# Altium PCB LaserTagTargetBoard.PcbDoc
Units mil, origin at the board's own origin, x right, y up, seen from the top; angles counter-clockwise.
Board outline 2810 x 2320 mil, 2 copper layers (Top Layer, Bottom Layer); 7 components, 34 nets, 46 pads, 3 vias.
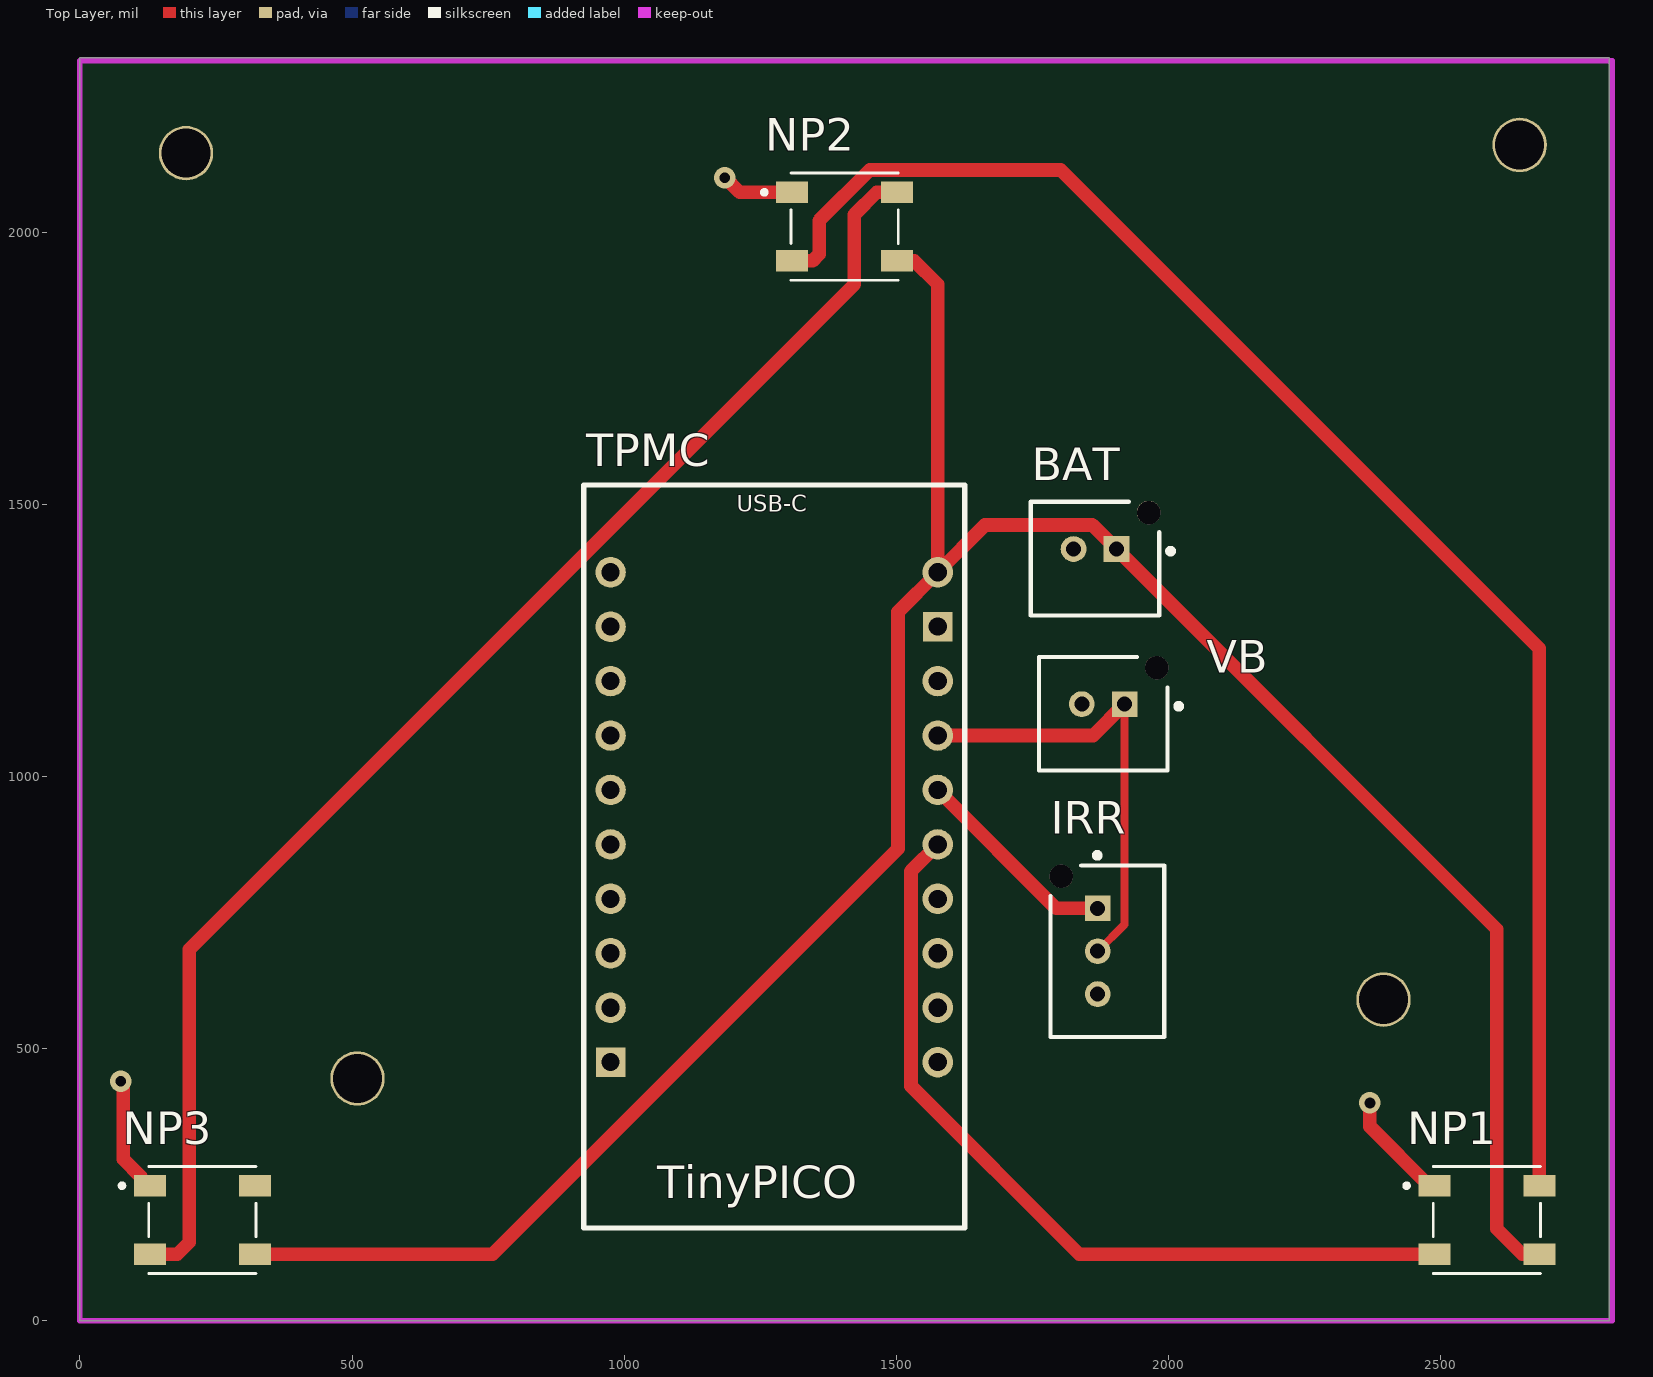
[diagram p0: Top Layer view]
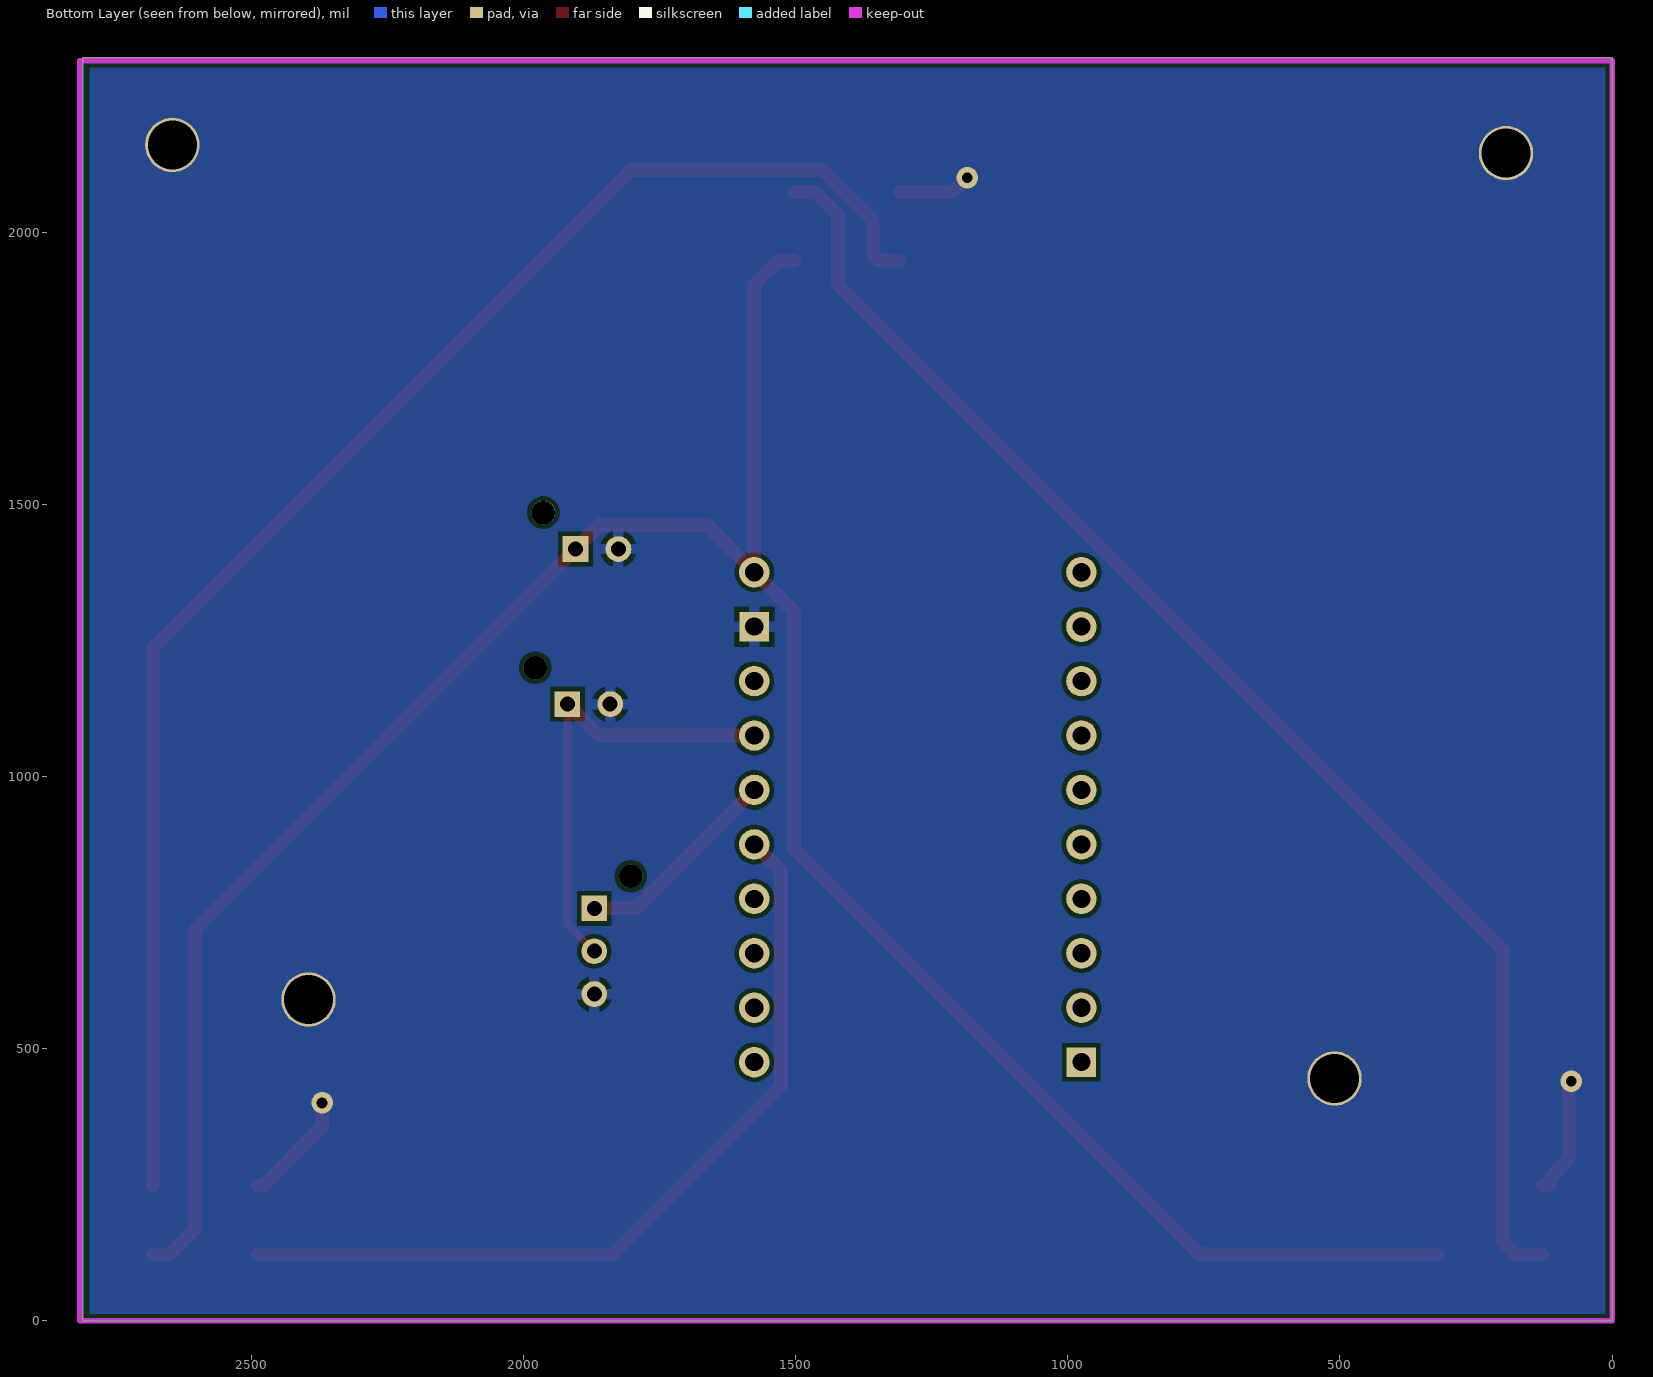
[diagram p1: Bottom Layer view, seen from below]

## Layer stack, top to bottom
Top Solder: solder mask 0.4, Solder Resist, Dk 3.5
Top Layer: signal copper 1.4
Dielectric 1: dielectric 12.6, FR-4, Dk 4.8
Bottom Layer: signal copper 1.4
Bottom Solder: solder mask 0.4, Solder Resist, Dk 3.5

## Board outline
0,0 2810,0 2810,2320 0,2320

## Design rules (kind name [scope] priority, off if disabled: settings)
BoardOutlineClearance [All] p1: gap=7.87 ignorepadtopadclearanceinfootprint=FALSE except(15.75: Arc-SplitBarrior Arc-SplitContinuation Track-SplitBarrior Track-SplitContinuation SMDPad-SplitBarrior SMDPad-SplitContinuation THPad-SplitBarrior THPad-SplitContinuation Via-SplitBarrior Via-SplitContinuation Fill-SplitBarrior Fill-SplitContinuation Poly-SplitBarrior Poly-SplitContinuation Region-SplitBarrior Region-SplitContinuation Text-SplitBarrior Text-SplitContinuation)
Clearance "Clearance Bottom Layer" [OnLayer('Bottom Layer')] p1: gap=8 ignorepadtopadclearanceinfootprint=TRUE except(10: Arc-Text Track-Text SMDPad-Text THPad-Text Via-Text Fill-Text Poly-Text Region-Text Text-Text)
Clearance "Clearance Top Layer" [OnLayer('Top Layer')] p2: gap=8 ignorepadtopadclearanceinfootprint=TRUE except(10: Arc-Text Track-Text SMDPad-Text THPad-Text Via-Text Fill-Text Poly-Text Region-Text Text-Text)
Clearance [All] p3: gap=7.87 ignorepadtopadclearanceinfootprint=FALSE except(3.5: Arc-Arc Arc-Track Arc-SMDPad Track-Track Track-SMDPad SMDPad-SMDPad; 5: Arc-Via Track-Via SMDPad-Via THPad-Via Via-Via; 10: Arc-Text Track-Text SMDPad-Text THPad-Text Via-Text Fill-Text Poly-Text Region-Text Text-Text)
HoleSize [All] p1: absolutevalues=TRUE maxlimit=248.03 minlimit=7.87 maxpercent=80.000 minpercent=20.000
MinimumAnnularRing [All] p1: minimumring=3
MinimumSolderMaskSliver [All] p1: minsoldermaskwidth=3.94
PolygonConnect PolygonConnect_1 [All] p1: thpad.connectstyle=Relief thpad.reliefconductorwidth=20 thpad.reliefentries=4 thpad.polygonreliefangle="90 Angle" thpad.airgapwidth=10 smdpad.connectstyle=Relief smdpad.reliefconductorwidth=20 smdpad.reliefentries=4 smdpad.polygonreliefangle="90 Angle" smdpad.airgapwidth=10 via.connectstyle=Direct via.reliefconductorwidth=20 via.reliefentries=4 via.polygonreliefangle="90 Angle" via.airgapwidth=10
RoutingCorners [All] p1: cornerstyle=Round minsetback=100 maxsetback=100
RoutingVias [All] p1: holewidth=19.68 width=39.37 viastyle="Through Hole" minholewidth=7.87 minwidth=17.72 maxholewidth=39.37 maxwidth=78.74
SilkToSilkClearance [All] p1: silktosilkclearance=3.94
SilkToSolderMaskClearance [IsPad] p1: minsilkscreentomaskgap=3.94 clearancetoexposedcopper=TRUE
SolderMaskExpansion [All] p1: expansion=4 istentingtop=FALSE
Width [All] p1: maxlimit=100 minlimit=3.5 preferedwidth=25 minimp=50.000000 maximp=50.000000 favimp=50.000000
25 further rules are at their usual default settings.

## Components (designator, comment, footprint, x,y, rotation, side; value= is the part's Value field where it differs from the comment)
BAT "B02B-PASK-1(LF)(SN)" FP-B02B-PASK-1_LF_SN-MFG 1865,1400 r0 top
IRR "B03B-PASK-1(LF)(SN)" FP-B03B-PASK-1_LF_SN-MFG 1887.72,678.74 r90 top
NP1 "1655" LED_1655 2585,185 r0 top
NP2 "1655" LED_1655 1405,2010 r0 top
NP3 "1655" LED_1655 225,185 r0 top
TPMC "TinyPICO" TinyPICO 1275.5,960.25 r0 top
VB "B02B-PASK-1(LF)(SN)" FP-B02B-PASK-1_LF_SN-MFG 1880,1115 r0 top

## Footprints (in the part's own frame and the unit in brackets; to place one, negate y for a bottom-side part, rotate by r counter-clockwise, add the part's x,y. Pads: shape width x height; smd on the part's side, far side on the other; paste and mask are expansions set on the pad)
FP-B02B-PASK-1_LF_SN-MFG [mm]
  rect 1.2x1.2 hole 0.7 paste-1000 mask+0: 1(1,0.45)
  round 1.2 hole 0.7 paste-1000 mask+0: 2(-1,0.45)
  round 1.1 hole 1.1 unplated paste-1000 mask+0: ""(2.5,2.15)
  silkscreen extent -3,-2.65 3.65,2.65, body extent -3.1,-2.75 3.15,2.8, height 0.25
FP-B03B-PASK-1_LF_SN-MFG [mm]
  rect 1.2x1.2 hole 0.7 paste-1000 mask+0: 1(2,0.45)
  round 1.2 hole 0.7 paste-1000 mask+0: 2(0,0.45) 3(-2,0.45)
  round 1.1 hole 1.1 unplated paste-1000 mask+0: ""(3.5,2.15)
  silkscreen extent -4,-2.65 4.6,2.65, body extent -4.1,-2.75 4.15,2.8, height 0.25
LED_1655 [mm]
  rect 1.5x1 smd: 1(-2.45,1.6) 2(-2.45,-1.6) 3(2.45,-1.6) 4(2.45,1.6)
  silkscreen extent -3.85,-2.5 2.5,2.5
TinyPICO [mil]
  round 56 hole 33.25: 3V3(300.5,114.75) 4(300.5,14.75) 5(-300.5,114.75) 5V(300.5,214.75) 14(300.5,-85.25) 15(300.5,-185.25) 18(-300.5,214.75) 19(-300.5,314.75) 21(-300.5,-85.25) 22(-300.5,14.75) 23(-300.5,414.75) 25(300.5,-485.25) 26(300.5,-385.25) 27(300.5,-285.25) 32(-300.5,-185.25) 33(-300.5,-285.25) BAT(300.5,414.75) RST(-300.5,-385.25)
  rect 54x54 hole 33.25: GND1(300.5,314.75) GND2(-300.5,-485.25)
  silkscreen extent -350,-790 350,575

## Part data
BAT VB: library part CMP-17439-000415-1, "CONN HEADER VERT 2POS 2MM", Color=Natural, Current Rating=3A, Flammability Rating="UL94 V-0", Housing Color=White, Insulation Resistance=1GR, Max Operating Temperature=85°C, Min Operating Temperature=-25°C, Voltage Rating=250V, Connector Type=Header, Contact Finish - Mating=TIN, Contact Material="Copper Alloy", Contact Mating Length=0.126inch, Contact Plating=Tin, Contact Shape=Square, Contact Type="Male Pin", Fastening Type=Ramp, Gender=Male, Insulation Color=Natural, Insulation Material=PBT, Lead Free="Lead Free", Mated Stacking Heights=14.9mm, Material=Polybutylene, Mount="Through Hole", Number of Contacts=2, Number of Positions=2, Number of Rows=1, Orientation=Straight, Packaging=Bulk, Pitch=2mm, Series=PA, Termination=Solder
IRR: library part CMP-17439-000193-1, "CONN HEADER VERT 3POS 2MM", Color=Natural, Current Rating=3A, Flammability Rating="UL94 V-0", Housing Color=White, Voltage Rating=250V, Connector Type=Header, Contact Finish - Mating=TIN, Contact Material="Copper Alloy", Contact Mating Length=0.126inch, Contact Plating=Tin, Contact Shape=Square, Contact Type="Male Pin", Fastening Type=Ramp, Insulation Color=Natural, Insulation Material=PBT, Lead Free="Lead Free", Mated Stacking Heights=14.9mm, Mount="Through Hole", Number of Contacts=3, Number of Positions=3, Number of Rows=1, Orientation=Straight, Packaging=Bulk, Pitch=2mm, Series=PA, Termination=Solder
NP1 NP2 NP3: "Ws2812b 5050 Rgb Led With Integrated Driver Chip Pack Of 10", Package=None, Availability=Unavailable, MP=1655, Price=None

## Free pads (board coordinates)
  round 100 hole 90: 9(195,2145) 10(2645,2160) 11(2395,590) 12(510,445)

## Via types
v1: diameter 39.37, hole 19.68, Top Layer to Bottom Layer, 3 vias

## Nets (pads, with @x,y where several pads share a name; then routed paths per layer and width w, separated by ;. In a path a pad name is that pad's centre, name@x,y a point inside that pad or via, vN(x,y) a via of type N, cw(c..) or ccw(c..) an arc to the next point about the centre after c; other vN are vias at no path point)
3V: IRR.2 TPMC.3V3 VB.1 | length 841.7
  Top Layer w15: IRR.2 1919.37,728.11 VB.1
  Top Layer w25: TPMC.3V3 1861.65,1075 VB.1
3VESP: 
BAT: BAT.1 NP1.3 NP2.3 NP3.3 TPMC.BAT | length 4668.4
  Top Layer w25: NP3.3 758.01,122.01 1503,867 1503,1302 TPMC.BAT ; NP2.3 1532.99,1947.01 1576,1904 TPMC.BAT ; NP1.3 2650,122.01 2603,169.01 2603,719.09 BAT.1 1860.25,1461.84 1662.84,1461.84 TPMC.BAT
CLIP: 
GND: BAT.2 IRR.3 NP1.1 NP2.1 NP3.1 pad.9 pad.10 pad.11 pad.12 TPMC.GND1 VB.2 | length 561.6
  Top Layer w25: v1(75,440) 80,435 80,296.54 111.52,265.02 111.52,255.18 118.7,247.99 NP3.1 ; v1(1185,2100) 1212.01,2072.99 NP2.1 ; v1(2370,400) 2370,356.69 2478.7,247.99 NP1.1
IRE: 
IRR: IRR.1 TPMC.4 | length 384.1
  Top Layer w25: TPMC.4 1793.52,757.48 IRR.1
JS1: 
JS2: 
JS3: 
JS4: 
JS5: 
NEOPIX: 
"Net4.7K PDR_1": 
"Net4.7K PUR JS1_1": 
"Net4.7K PUR JS2_1": 
"Net4.7K PUR JS3_1": 
"Net4.7K PUR JS4_1": 
"Net4.7K PUR JS5_1": 
Net10K_1: 
Net10K_2: 
"NetLaser Pointer_2": 
NP: NP1.2 TPMC.14 | length 1553.8
  Top Layer w25: TPMC.14 1527,826 1527,431 1835.99,122.01 NP1.2
NP2: NP1.4 NP2.2 | length 2829.5
  Top Layer w25: NP2.2 1346,1947.01 1358,1959.01 1358,2021 1451,2114 1802,2114 2681,1235 2681,247.99 NP1.4
NP3: NP2.4 NP3.2 | length 2571.2
  Top Layer w25: NP3.2 179.01,122.01 201,144 201,682 1423,1904 1423,2032 1463.99,2072.99 NP2.4
PRIMER: 
RST: 
SCL: 
SDA: 
SPKR1: 
SPKR2: 
"SPKR Rx": 
"SPKR Tx": 
TRIGGER: 
pads on no net: BAT. IRR. NP3.4 TPMC.5 TPMC.5V TPMC.15 TPMC.18 TPMC.19 TPMC.21 TPMC.22 TPMC.23 TPMC.25 TPMC.26 TPMC.27 TPMC.32 TPMC.33 TPMC.GND2 TPMC.RST VB.

## Polygon pours and split planes (outlines as drawn)
GND on Bottom Layer "GND_L02_P000" (solid, pour order 0): 4.97,-10.03 2805,-10.03 2805,2310 9.97,2310

## Keep-outs
Keep-Out Layer:
  lines w10: 0,0 2815,0 2815,2315 0,2315 0,0

## Text inside footprints (layer, text, board x,y; h text height)
TPMC: Top Overlay "USB-C" at 1206.5,1486.25 h30